# Altium PCB VTM Ethernet Module.PcbDoc
Units mil, origin at the board's own origin, x right, y up, seen from the top; angles counter-clockwise.
Board outline 2475 x 2800 mil, 2 copper layers (Top Layer, Bottom Layer); 58 components, 35 nets, 198 pads, 38 vias.
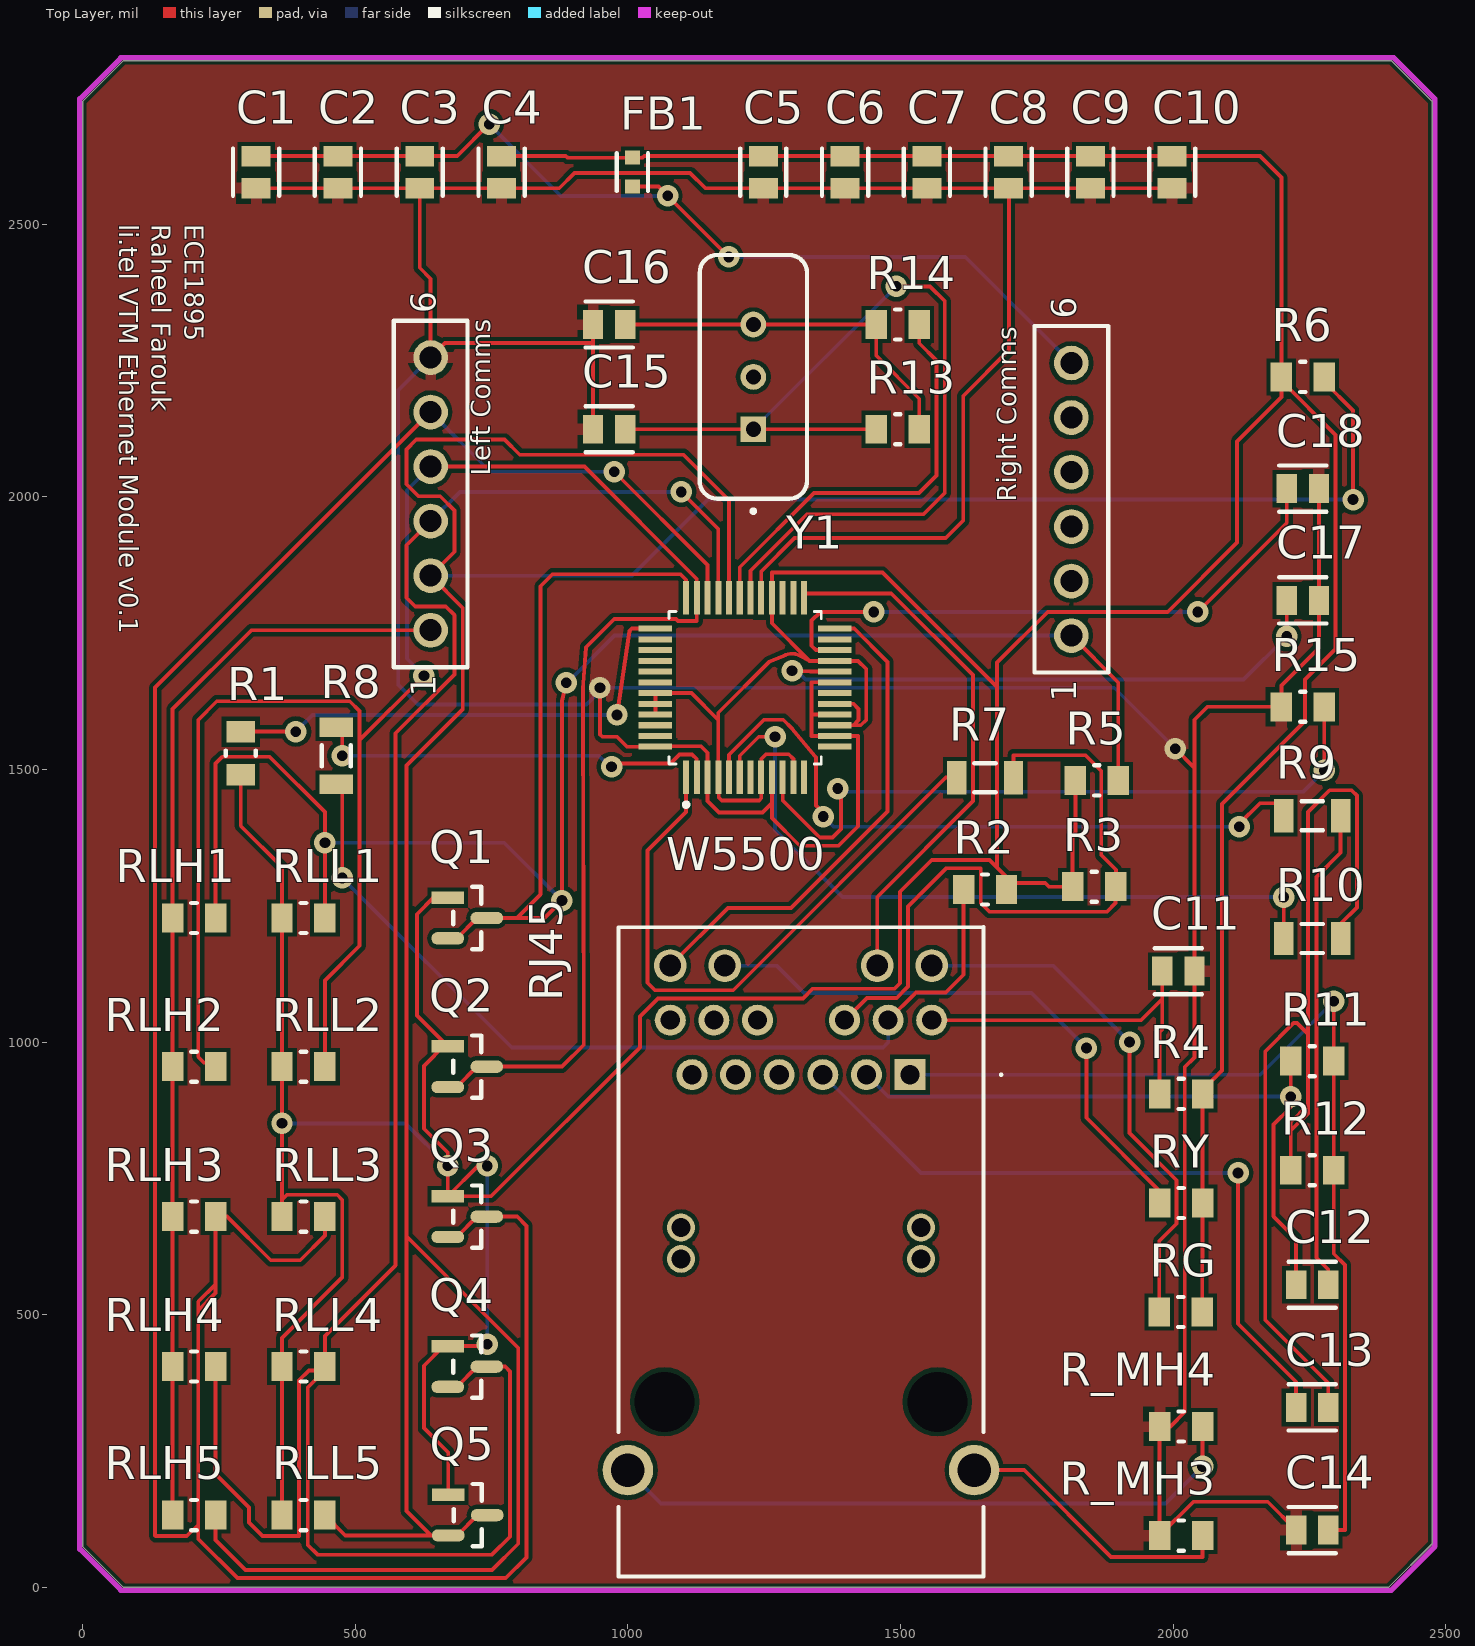
[diagram p0: Top Layer view]
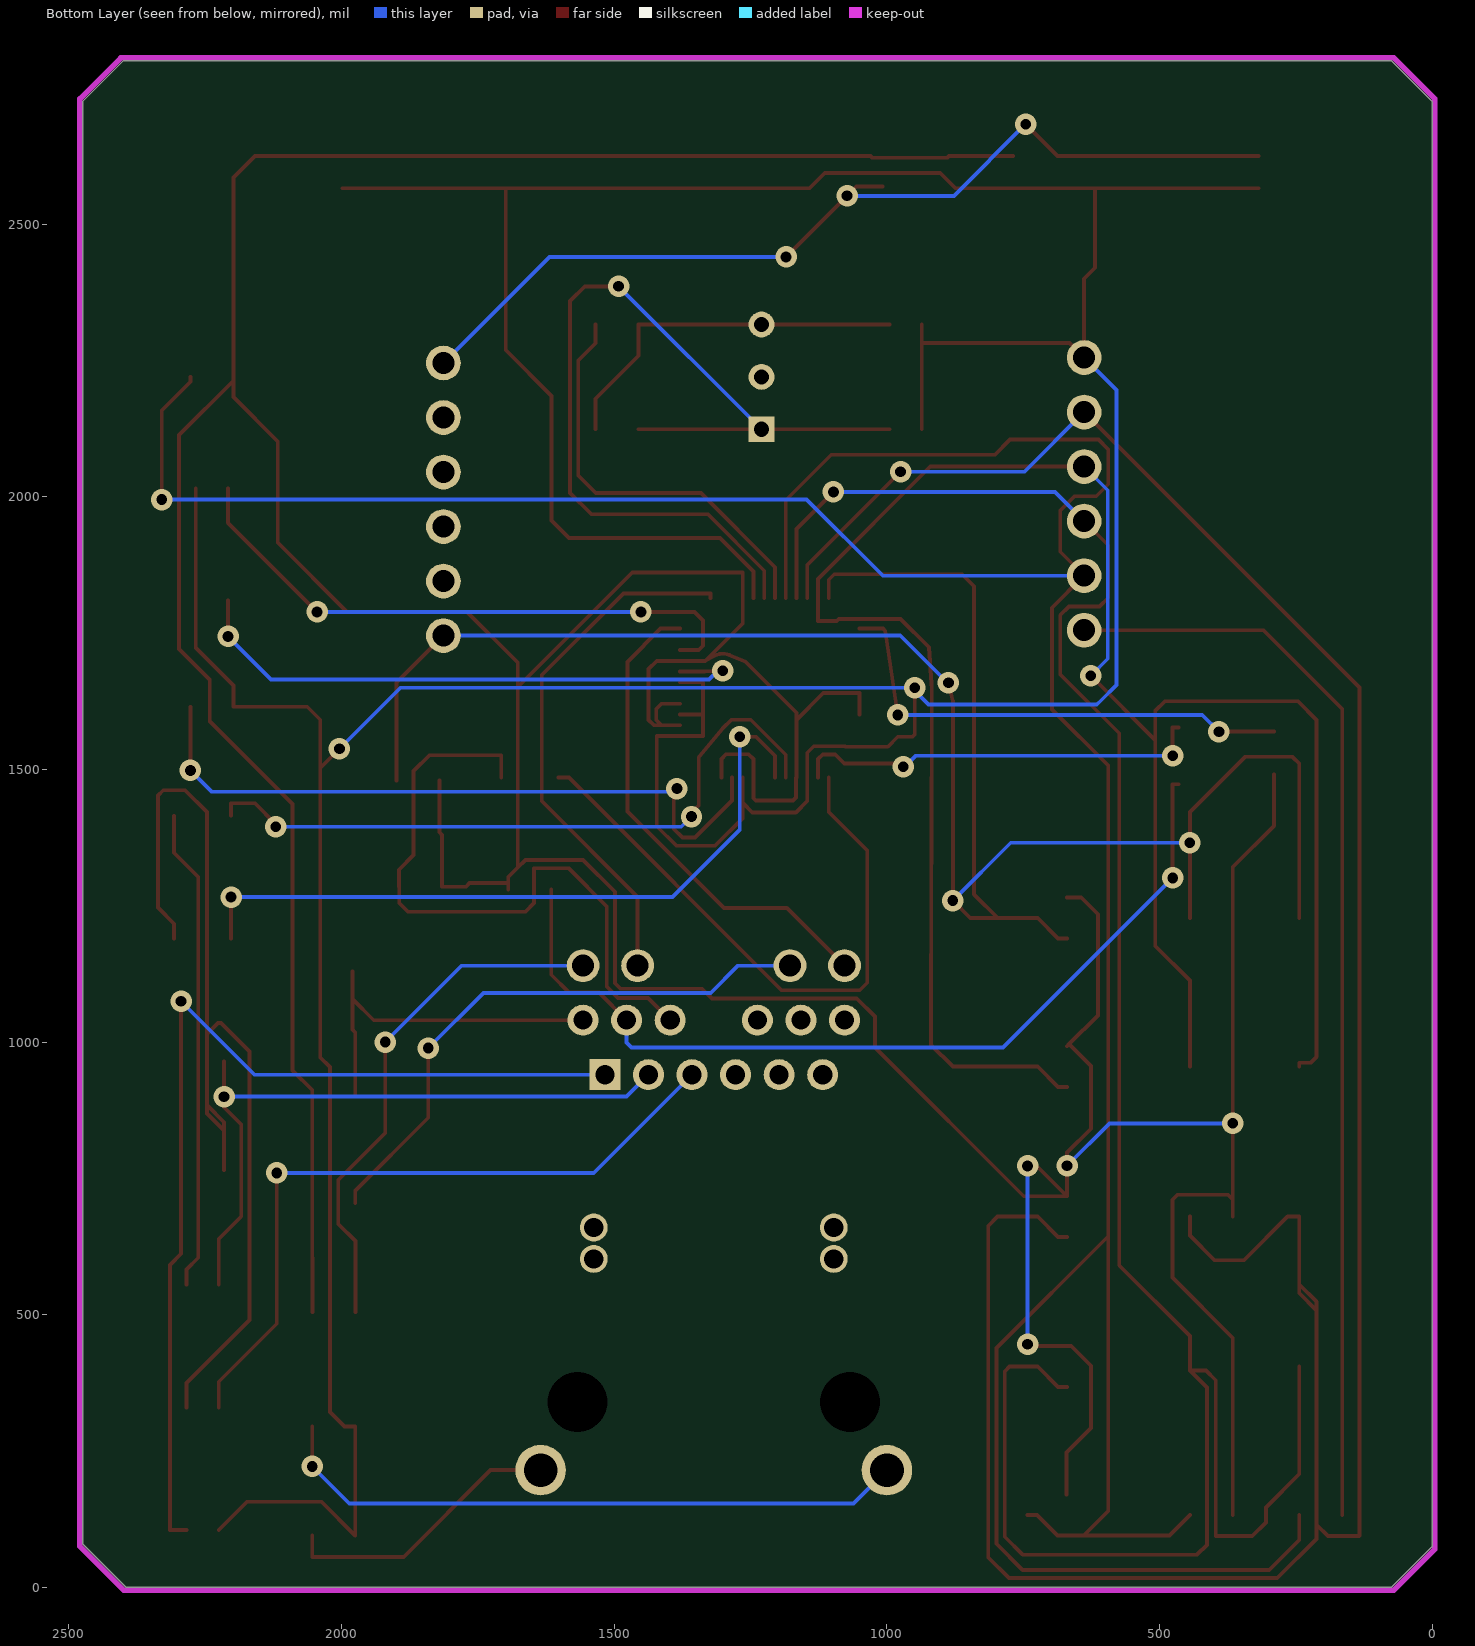
[diagram p1: Bottom Layer view, seen from below]
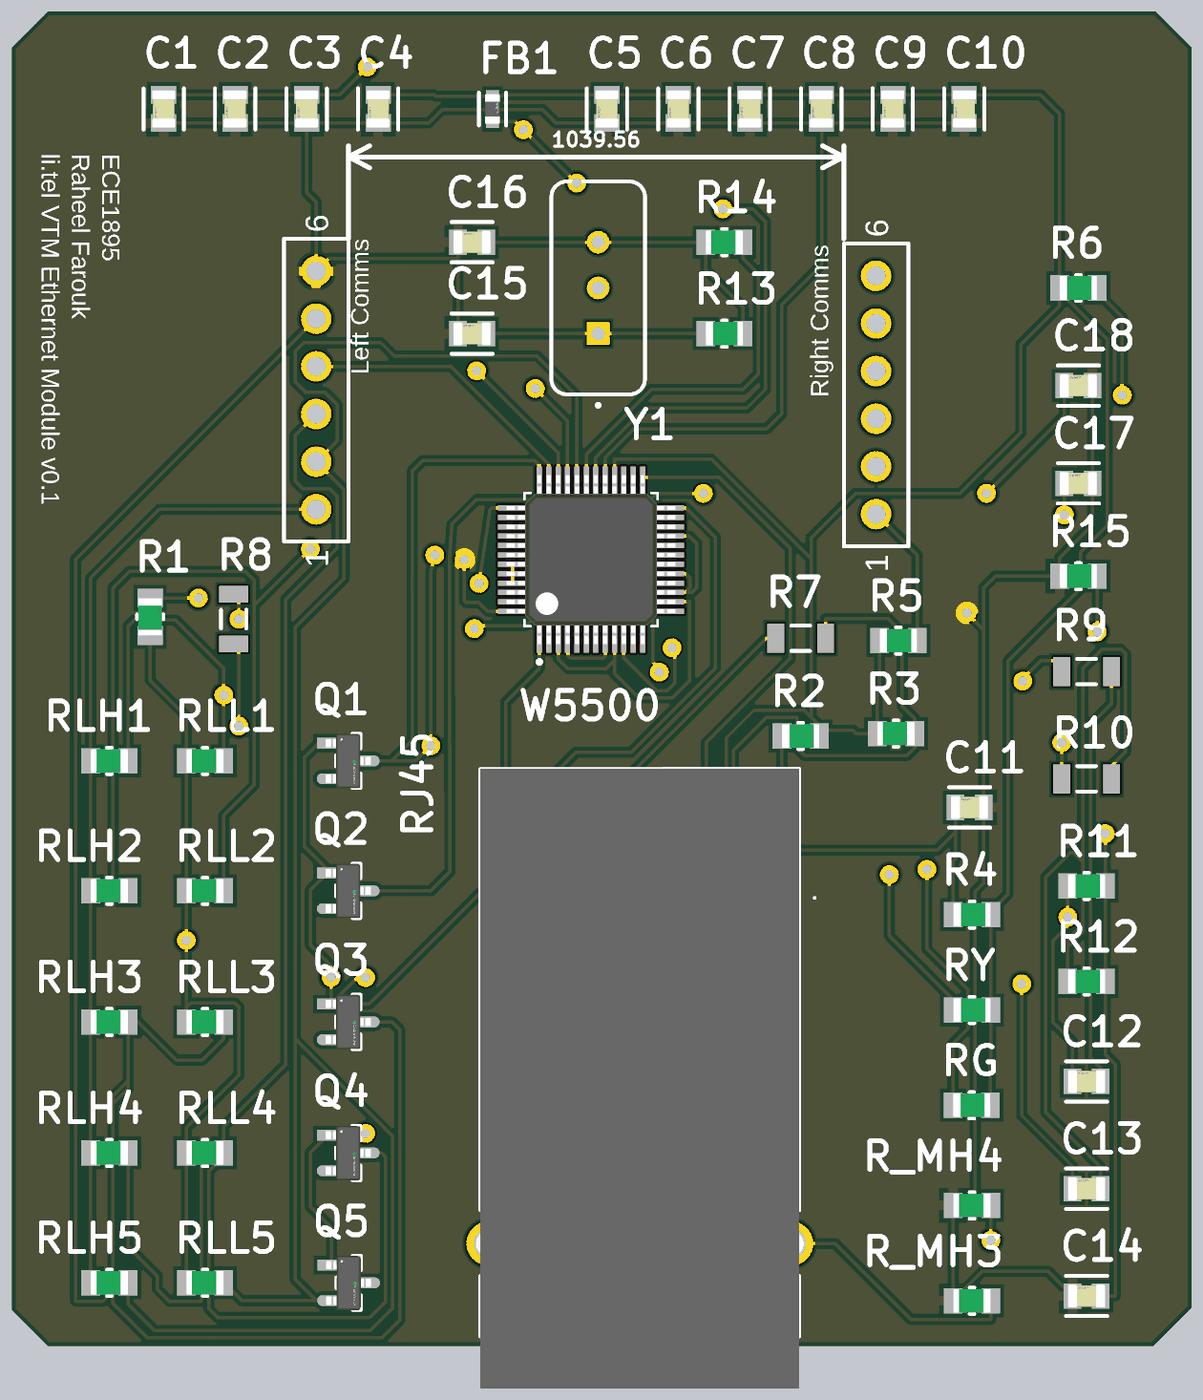
[diagram p2: 3D render of the assembled board from above, using the file's embedded part models]

## Layer stack, top to bottom
Top Solder: solder mask 0.4, Solder Resist, Dk 3.5
Top Layer: signal copper 1.4
Dielectric 1: dielectric 12.6, FR-4, Dk 4.8
Bottom Layer: signal copper 1.4
Bottom Solder: solder mask 0.4, Solder Resist, Dk 3.5

## Board outline
0,75 0,2725 75,2800 2400,2800 2475,2725 2475,80 2395,0 75,0

## Design rules (kind name [scope] priority, off if disabled: settings)
BoardOutlineClearance [All] p1: gap=7.87 ignorepadtopadclearanceinfootprint=FALSE except(15.75: Arc-SplitBarrior Arc-SplitContinuation Track-SplitBarrior Track-SplitContinuation SMDPad-SplitBarrior SMDPad-SplitContinuation THPad-SplitBarrior THPad-SplitContinuation Via-SplitBarrior Via-SplitContinuation Fill-SplitBarrior Fill-SplitContinuation Poly-SplitBarrior Poly-SplitContinuation Region-SplitBarrior Region-SplitContinuation Text-SplitBarrior Text-SplitContinuation)
Clearance "Clearance Bottom Layer" [OnLayer('Bottom Layer')] p1: gap=8 ignorepadtopadclearanceinfootprint=TRUE except(10: Arc-Text Track-Text SMDPad-Text THPad-Text Via-Text Fill-Text Poly-Text Region-Text Text-Text)
Clearance "Clearance Top Layer" [OnLayer('Top Layer')] p2: gap=8 ignorepadtopadclearanceinfootprint=TRUE except(10: Arc-Text Track-Text SMDPad-Text THPad-Text Via-Text Fill-Text Poly-Text Region-Text Text-Text)
Clearance [All] p3: gap=7.87 ignorepadtopadclearanceinfootprint=FALSE except(3.5: Arc-Arc Arc-Track Arc-SMDPad Track-Track Track-SMDPad SMDPad-SMDPad; 5: Arc-Via Track-Via SMDPad-Via THPad-Via Via-Via; 10: Arc-Text Track-Text SMDPad-Text THPad-Text Via-Text Fill-Text Poly-Text Region-Text Text-Text)
HoleSize [All] p1: absolutevalues=TRUE maxlimit=248.03 minlimit=7.87 maxpercent=80.000 minpercent=20.000
MinimumAnnularRing [All] p1: minimumring=3
MinimumSolderMaskSliver [All] p1: minsoldermaskwidth=3.94
PolygonConnect PolygonConnect_1 [All] p1: thpad.connectstyle=Relief thpad.reliefconductorwidth=20 thpad.reliefentries=4 thpad.polygonreliefangle="90 Angle" thpad.airgapwidth=10 smdpad.connectstyle=Relief smdpad.reliefconductorwidth=20 smdpad.reliefentries=4 smdpad.polygonreliefangle="90 Angle" smdpad.airgapwidth=10 via.connectstyle=Direct via.reliefconductorwidth=20 via.reliefentries=4 via.polygonreliefangle="90 Angle" via.airgapwidth=10
RoutingCorners [All] p1: cornerstyle=Round minsetback=100 maxsetback=100
RoutingVias [All] p1: holewidth=19.68 width=39.37 viastyle="Through Hole" minholewidth=7.87 minwidth=17.72 maxholewidth=39.37 maxwidth=78.74
SilkToSilkClearance [All] p1: silktosilkclearance=3.94
SilkToSolderMaskClearance [IsPad] p1: minsilkscreentomaskgap=3.94 clearancetoexposedcopper=TRUE
SolderMaskExpansion [All] p1: expansion=4 istentingtop=FALSE
Width [All] p1: maxlimit=100 minlimit=3.5 preferedwidth=7 minimp=50.000000 maximp=50.000000 favimp=50.000000
25 further rules are at their usual default settings.

## Components (designator, comment, footprint, x,y, rotation, side; value= is the part's Value field where it differs from the comment)
C1 "1uF" FP-C0805C-DN-MFG 318.27,2595.43 r90 top value="18 pF"
C2 "0.1uF" FP-C0805C-DN-MFG 468.27,2595.43 r90 top value="18 pF"
C3 "0.1uF" FP-C0805C-DN-MFG 618.27,2595.43 r90 top value="18 pF"
C4 "1uF" FP-C0805C-DN-MFG 768.27,2595.43 r90 top value="18 pF"
C5 "0.1uF" FP-C0805C-DN-MFG 1248.27,2595.43 r90 top value="18 pF"
C6 "0.1uF" FP-C0805C-DN-MFG 1398.27,2595.43 r90 top value="18 pF"
C7 "1uF" FP-C0805C-DN-MFG 1548.27,2595.43 r90 top value="18 pF"
C8 "0.1uF" FP-C0805C-DN-MFG 1698.27,2595.43 r90 top value="18 pF"
C9 "0.1uF" FP-C0805C-DN-MFG 1848.27,2595.43 r90 top value="18 pF"
C10 "0.1uF" FP-C0805C-DN-MFG 1998.27,2595.43 r90 top value="18 pF"
C11 "22nF" FP-C0805C-DN-MFG 2009.53,1130 r0 top value="18 pF"
C12 "6.8nF" FP-C0805C-DN-MFG 2255,555 r0 top value="18 pF"
C13 "6.8nF" FP-C0805C-DN-MFG 2255,330 r0 top value="18 pF"
C14 "0.1uF" FP-C0805C-DN-MFG 2255,105 r0 top value="18 pF"
C15 "18pF" FP-C0805C-DN-MFG 965.47,2123.94 r0 top value="18 pF"
C16 "18pF" FP-C0805C-DN-MFG 965.47,2316.06 r0 top value="18 pF"
C17 "4.7uF" FP-C0805C-DN-MFG 2237.83,1810 r0 top value="18 pF"
C18 "0.1uF" FP-C0805C-DN-MFG 2237.83,2015 r0 top value="18 pF"
FB1 "BLM18BD121BH1D" FP-BLM18-0_15-t0_8-MFG 1008.27,2595.43 r90 top
"Left Comms" "SAMTEC-TSW-106-07-X-SJ" SAMTEC-TSW-106-07-X-S 638.27,2005.43 r90 top
Q1 "BSS138" FP-318-08-IPC_B 705.47,1227.6 r0 top
Q2 "BSS138" FP-318-08-IPC_B 705.47,955 r0 top
Q3 "BSS138" FP-318-08-IPC_B 705.47,680 r0 top
Q4 "BSS138" FP-318-08-IPC_B 705.47,405 r0 top
Q5 "BSS138" FP-318-08-IPC_B 706.31,132.6 r0 top
R1 "4.7k" FP-CPF0805-MFG 290,1530 r270 top
R2 "49.9R" FP-CPF0805-MFG 1655,1280 r0 top
R3 "49.9R" FP-CPF0805-MFG 1855,1285 r180 top
R4 "10R" FP-CPF0805-MFG 2014.53,905 r0 top
R5 "4.7k" FP-CPF0805-MFG 1860,1480 r0 top
R6 "4.7k" FP-CPF0805-MFG 2237.83,2220 r0 top
R7 "3.3R" RESC3216X70X50LL05T20 1655,1485 r0 top
R8 "3.3R" RESC3216X70X50LL05T20 465,1525 r270 top
R9 "3.3R" RESC3216X70X50LL05T20 2255,1415 r0 top
R10 "3.3R" RESC3216X70X50LL05T20 2255,1190 r0 top
R11 "49.9R" FP-CPF0805-MFG 2255,965 r0 top
R12 "49.9R" FP-CPF0805-MFG 2255,765 r0 top
R13 "1M" FP-CPF0805-MFG 1495,2123.94 r0 top
R14 "0R" FP-CPF0805-MFG 1495,2316.06 r180 top
R15 "12.4k" FP-CPF0805-MFG 2237.83,1615 r0 top
R_MH3 "0R" FP-CPF0805-MFG 2014.53,95 r180 top
R_MH4 "0R" FP-CPF0805-MFG 2014.53,295 r180 top
RG "470R" FP-CPF0805-MFG 2013.9,505 r0 top
"Right Comms" "SAMTEC-TSW-106-07-X-SJ" SAMTEC-TSW-106-07-X-S 1813.27,1995.43 r90 top
RJ45 "7499711421" 7499711421 1517.28,940.2 r0 top
RLH1 "10k" FP-CPF0805-MFG 204.37,1227.6 r180 top
RLH2 "10k" FP-CPF0805-MFG 204.37,955 r180 top
RLH3 "10k" FP-CPF0805-MFG 204.37,680 r180 top
RLH4 "10k" FP-CPF0805-MFG 204.37,405 r180 top
RLH5 "10k" FP-CPF0805-MFG 204.37,132.6 r180 top
RLL1 "10k" FP-CPF0805-MFG 405,1227.6 r180 top
RLL2 "10k" FP-CPF0805-MFG 405,955 r180 top
RLL3 "10k" FP-CPF0805-MFG 405,680 r180 top
RLL4 "10k" FP-CPF0805-MFG 405,405 r180 top
RLL5 "10k" FP-CPF0805-MFG 405,132.6 r180 top
RY "470R" FP-CPF0805-MFG 2014.53,705 r0 top
W5500 "W5500" QFP50P900X900X160-48N 1215,1650 r90 top
Y1 "25MHz" ECS-4X-3IL 1230,2220 r90 top

## Footprints (in the part's own frame and the unit in brackets; to place one, negate y for a bottom-side part, rotate by r counter-clockwise, add the part's x,y. Pads: shape width x height; smd on the part's side, far side on the other; paste and mask are expansions set on the pad)
7499711421 [mm]
  rect 1.446x1.446 hole 0.89: 1(0,0)
  round 1.446 hole 0.89: 2(-2.03,0) 3(-4.06,0) 4(-6.09,0) 5(-8.12,0) 6(-10.15,0) 7(1.015,2.54) 8(-1.015,2.54) 9(-3.045,2.54) 10(-7.105,2.54) 11(-9.135,2.54) 12(-11.165,2.54)
  round 1.3 hole 0.89: 13(0.515,-7.12) 14(-10.665,-7.12) 15(0.515,-8.58) 16(-10.665,-8.58)
  round 1.53 hole 1.02: 17(1.015,5.08) 18(-1.525,5.08) 19(-8.625,5.08) 20(-11.165,5.08)
  round 1.4 hole 2.8 unplated: MH1(1.275,-15.24) MH2(-11.425,-15.24)
  round 2.355 hole 1.57: MH3(2.99,-18.42) MH4(-13.14,-18.42)
  silkscreen extent -13.58,-23.37 4.3,6.88, body extent -13.82,-26.14 3.67,6.88, height 13.97
ECS-4X-3IL [mm]
  rect 1.2x1.2 hole 0.7: 1(-2.44,0)
  round 1.2 hole 0.7: 2(0,0) 3(2.44,0)
  silkscreen extent -6.34,-2.5 5.68,2.5, body extent -5.68,-2.5 5.68,2.5, height 3.5
FP-318-08-IPC_B [mil]
  rect 60.01x22.76 smd paste+0 mask+0: 1(-35.83,37.4)
  rrect100% 60.01x22.76 smd paste+0 mask+0: 2(-35.83,-37.4) 3(35.83,0)
  silkscreen extent -26,-57 26,57, body extent -76,-67 76,67, height 10
FP-BLM18-0_15-t0_8-MFG [mm]
  rect 0.65x0.7 smd paste+0 mask+0: 1(-0.675,0) 2(0.675,0)
  silkscreen extent -0.88,-0.73 0.88,0.73, body extent -1.1,-0.58 1.1,0.58, height 0.25
FP-C0805C-DN-MFG [mm]
  rect 0.95x1.35 smd paste+0 mask+0: 1(-0.75,0) 2(0.75,0)
  silkscreen extent -1.1,-1.07 1.1,1.08, body extent -1.4,-0.85 1.4,0.85, height 0.25
FP-CPF0805-MFG [mm]
  rect 1x1.35 smd paste+0 mask+0: 1(-1,0) 2(1,0)
  silkscreen extent -0.13,-0.7 0.12,0.7, body extent -1.6,-0.8 1.6,0.8, height 0.25
QFP50P900X900X160-48N [mm]
  rect 1.56x0.281 smd mask+0.127: 1(-4.18,2.75) 2(-4.18,2.25) 3(-4.18,1.75) 4(-4.18,1.25) 5(-4.18,0.75) 6(-4.18,0.25) 7(-4.18,-0.25) 8(-4.18,-0.75) 9(-4.18,-1.25) 10(-4.18,-1.75) 11(-4.18,-2.25) 12(-4.18,-2.75) 25(4.18,-2.75) 26(4.18,-2.25) 27(4.18,-1.75) 28(4.18,-1.25) 29(4.18,-0.75) 30(4.18,-0.25) 31(4.18,0.25) 32(4.18,0.75) 33(4.18,1.25) 34(4.18,1.75) 35(4.18,2.25) 36(4.18,2.75)
  rect 0.281x1.56 smd mask+0.127: 13(-2.75,-4.18) 14(-2.25,-4.18) 15(-1.75,-4.18) 16(-1.25,-4.18) 17(-0.75,-4.18) 18(-0.25,-4.18) 19(0.25,-4.18) 20(0.75,-4.18) 21(1.25,-4.18) 22(1.75,-4.18) 23(2.25,-4.18) 24(2.75,-4.18) 37(2.75,4.18) 38(2.25,4.18) 39(1.75,4.18) 40(1.25,4.18) 41(0.75,4.18) 42(0.25,4.18) 43(-0.25,4.18) 44(-0.75,4.18) 45(-1.25,4.18) 46(-1.75,4.18) 47(-2.25,4.18) 48(-2.75,4.18)
  silkscreen extent -5.55,-3.55 3.55,3.55, body extent -4.5,-4.5 4.5,4.5, height 1.6
RESC3216X70X50LL05T20 [mm] "Chip Resistor, 2-Leads, Body 3.20x1.60mm, IPC High Density"
  rect 0.9x1.55 smd: 1(-1.325,0) 2(1.325,0)
  silkscreen extent -0.5,-0.68 0.5,0.67, body extent -1.63,-0.82 1.62,0.82, height 0.7
SAMTEC-TSW-106-07-X-S [mm]
  round 1.62 hole 1.02: 1(-6.35,0) 2(-3.81,0) 3(-1.27,0) 4(1.27,0) 5(3.81,0) 6(6.35,0)
  silkscreen extent -8.07,-1.72 8.07,1.72

## Part data
C1 C2 C3 C4 C5 C6 C7 C8 C9 C10 C11 C12 C13 C14 C15 C16 C17 C18: library part CMP-1036-01133-2, "CAP CER 18PF 25V 20% NP0 0805", Capacitance="18 pF", Manufacturer=KEMET, Manufacturer Part Number=C0805C180M3GACTU, Package=C0805C-DN, Temperature="-55°C to +125°C", Temperature Characteristic=C0G, Temperature Coefficient=30ppm/°C, Temperature Range High=+125°C, Temperature Range Low=-55°C, Tolerance=0.2, Voltage Rating="25 V", Automotive=No, Category=Cap, ComponentLink2Description=Datasheet, ComponentLink2URL=https://content.kemet.com/datasheets/KEM_C1003_C0G_SMD.pdf, Device Class L1="Passive Components", Device Class L2=Capacitors, Device Class L3="Ceramic Capacitors", Digikey Description="CAP CER 18PF 25V 20% NP0 0805", Height=0.88mm, Ipc Land Pattern Name=CAPC200125X78, Lead Free=Yes, Material=Ceramic, Mouser Description="Multilayer Ceramic Capacitors MLCC - SMD/SMT 25volts 18pF C0G 20%", Octopart=https://octopart.com/c0805c180m3gactu-kemet-17137232, RoHS=TRUE
FB1: library part CMP-06046-002548-1, "Chip Ferrite Bead, 0603, 120Ω @ 100MHz, 0.4Ω, 25%, 300mA", Case Code (Imperial)=0603, Case Code (Metric)=1608, DC Resistance (DCR)=400mR, Max Current Rating=300mA, Max Operating Temperature=150°C, Min Operating Temperature=-55°C, Ratings=AEC-Q200, Case/Package=0603, Number of Lines=1, RoHS Compliant=Yes
Q1 Q2 Q3 Q4 Q5: library part CMP-07173-000101-1, "MOSFET N-CH 50V 220MA SOT-23", Case/Package=SOT-23, Continuous Drain Current (ID)=220mA, Drain to Source Breakdown Voltage=50V, Drain to Source Resistance=3.5R, Gate to Source Voltage (Vgs)=20V, Input Capacitance=27pF, Max Operating Temperature=150°C, Max Power Dissipation=360mW, Min Operating Temperature=-55°C, On-State Resistance=6R, Package Quantity=1, Threshold Voltage=1.3V, Contact Plating=Tin, Current Rating=220mA, Drain to Source Voltage (Vdss)=50V, Dual Supply Voltage=50V, Element Configuration=Single, Fall Time=9ns, Height=0.93mm, Lead Free="Lead Free", Length=2.92mm, Mount="Surface Mount", Nominal Vgs=1.3V, Number of Elements=1, Number of Pins=3, Packaging="Tape and Reel", Power Dissipation=360mW, Radiation Hardening=No, Rds On Max=3.5R, REACH SVHC="No SVHC", Rise Time=9ns, Termination=SMD/SMT, Turn-Off Delay Time=20ns, Turn-On Delay Time=2.5ns, Voltage Rating (DC)=50V, Weight=0.03g, Width=1.3mm
R1 R2 R3 R4 R5 R6 R11 R12 R13 R14 R15 R_MH3 R_MH4 RG RLH1 RLH2 RLH3 RLH4 RLH5 RLL1 RLL2 RLL3 RLL4 RLL5 RY: library part CMP-03211-011426-1, "RES SMD 1.6M OHM 0.1% 1/10W 0805", Case Code (Imperial)=0805, Case Code (Metric)=2012, Max Operating Temperature=155°C, Max Power Dissipation=100mW, Min Operating Temperature=-55°C, Number of Resistors=1, Package Quantity=1000, Resistance=1.6MR, Resistor Type="Thin Film", Temperature Coefficient=25ppm/°C, Tolerance=0.1%, Voltage Rating=100V, Case/Package=0805, ELV=Compliant, Height=0.55mm, Length=2mm, Mount="Surface Mount", Number of Terminations=2, Packaging="Tape and Reel", Power Rating=100mW, RoHS Compliant=Yes, Series="CPF, Neohm", Termination=Solder, Weight=0.000194oz, Width=1.25mm
R7 R8 R9 R10: library part CMP-2003-00687-1, Manufacturer=Panasonic, Part Number=ERJ-8RQF3R3V
RJ45: "Connector", Manufacturer_Name="Wurth Elektronik", Mouser Part Number=710-7499711421, Datasheet Link=https://www.we-online.com/catalog/datasheet/7499711421.pdf, Height=13.87mm, Manufacturer_Part_Number=7499711421, Mouser Price/Stock=https://www.mouser.co.uk/ProductDetail/Wurth-Elektronik/7499711421?qs=ljCeji4nMDkSFYeFRPO9OA%3D%3D
W5500: "Ethernet Controller 10/100 Base-T/TX PHY SPI Interface 48-LQFP (7x7)", Package=None, Availability="In Stock", Check_prices=https://www.snapeda.com/parts/W5500/WIZnet/view-part/?ref=eda, MF=WIZnet, MP=W5500, Price=None, Purchase-URL=https://pricing.snapeda.com/search/part/W5500/?ref=eda, SnapEDA_Link=https://www.snapeda.com/parts/W5500/WIZnet/view-part/?ref=snap
Y1: library part CMP-1669-00002-2, "CRYSTAL 8.00 MHZ 20PF 49US", Manufacturer=ECS, PartNumber=ECS-80-20-4X, ComponentLink1Description=Datasheet, ComponentLink1URL=http://www.ecsxtal.com/store/pdf/hc-49usx.pdf, PackageReference=4X-3IL

## Via types
v1: diameter 39.37, hole 19.68, Top Layer to Bottom Layer, 38 vias

## Nets (pads, with @x,y where several pads share a name; then routed paths per layer and width w, separated by ;. In a path a pad name is that pad's centre, name@x,y a point inside that pad or via, vN(x,y) a via of type N, cw(c..) or ccw(c..) an arc to the next point about the centre after c; other vN are vias at no path point)
3v3In: "Right Comms.6" C1.2 C2.2 C3.2 FB1.1 | length 1772.4
  Top Layer w7: C1.2 C2.2 C3.2 687,2624.96 v1(745.52,2683.48) ; FB1.1 1056.14,2568.86 v1(1073,2552) v1(1185,2440)
  Bottom Layer w7: v1(745.52,2683.48) 877,2552 v1(1073,2552) ; v1(1185,2440) 1618.7,2440 1813.27,2245.43
+5: "Left Comms.1" RLH1.2 RLH2.2 RLH3.2 RLH4.2 RLH5.2 | length 2011.5
  Top Layer w7: RLH5.2 RLH4.2 RLH3.2 RLH2.2 RLH1.2 165,1611 309.43,1755.43 638.27,1755.43
ACTn: W5500.27
CS: "Left Comms.2" Q5.2 Q5.3 R6.2 RLH5.1 RLL5.1 W5500.32 | length 6597.2
  Top Layer w7: RLH5.1 243.74,87 298.74,32 751,32 799,80 799,439 594,644 ; RLL5.1 481.77,95.2 639,95.2 ; Q5.3 724.4,132.6 687,95.2 Q5.2 639,95.2 ; W5500.32 1185.47,1993.79 1102.07,2077.19 801.81,2077.19 774,2105 612,2105 594,2087 594,2023 616,2001 656,2001 682,1975 682,1899.17 638.27,1855.43 697,1796.7 697,1610 594,1507 594,644 ; R6.2 2277.2,2211 2330,2158.2 v1(2330,1995) ; 594,644 594,140.2 639,95.2
  Bottom Layer w7: 638.27,1855.43 1007.64,1855.43 1147.2,1995 v1(2330,1995)
GND: "Left Comms.6" C1.1 C2.1 C3.1 C4.1 C5.1 C6.1 C7.1 C8.1 C9.1 C10.1 C11.2 C14.1 C15.1 C16.1 C17.2 C18.2 R15.1 R_MH3.2 R_MH4.2 W5500.3 W5500.9 W5500.14 W5500.16 W5500.19 W5500.29 W5500.48 | length 9455.6
  Top Layer w7: C1.1 C2.1 C3.1 ; C15.1 935.94,2282 ; C16.1 935.94,2282 ; v1(948.81,1650) 948.81,1564.1 952.92,1560 980,1560 998.27,1541.73 1076.49,1541.73 1076.49,1542.64 1134.09,1542.64 1146.1,1530.63 W5500.3 1146.1,1441.9 1167,1421 1247,1421 1264.21,1438.21 ; W5500.29 1244.53,1863 1305.82,1924.3 1583,1924.3 1615,1956.3 1615,2185 1699,2269 C8.1@1699,2565.91 ; W5500.9 1264.21,1438.21 ; W5500.16 1337,1600.79 ; W5500.19 1337,1659.84 1337,1600.79 ; C10.1 C9.1 C8.1@1699,2565.91 ; v1(2004,1538) 2039.06,1502.94 ; C14.1 2173.47,157 2037.16,157 R_MH3.2 R_MH4.2 1995,295 2021.34,321.34 2021.34,954.29 2039.06,972 C11.2 2039.06,1502.94 ; C18.2 C17.2 2267.36,1722.9 2198.46,1654 R15.1 2063,1615 2039.06,1591.06 2039.06,1502.94 ; C3.1 618.27,2420 638.27,2400 638.27,2255.43 664.83,2282 935.94,2282 ; C3.1 C4.1 874,2565.91 902.09,2594 1114,2594 1142.09,2565.91 C5.1 C6.1 C7.1 C8.1 C8.1@1699,2565.91 ; 1264.21,1438.21 1264.21,1410.95 1315.16,1360 1386,1360 1422,1396 1422,1561.42 W5500.14 1337,1561.42 1337,1600.79
  Bottom Layer w7: 638.27,2255.43 579,2196.17 579,1655 607,1627 615,1619 924,1619 v1@951.91,1646.91 ; v1(948.81,1650) v1@951.91,1646.91 ; v1(2004,1538) 1892,1650 955,1650 v1@951.91,1646.91
INTn: "Right Comms.1" Q1.2 Q1.3 R5.2 RLH1.1 RLL1.1 W5500.36 | length 4045.3
  Top Layer w7: RLH1.1 243.74,1511 255.92,1523.18 343.08,1523.18 444.37,1421.89 v1(444.37,1365.63) RLL1.1 ; Q1.2 686,1190.2 723.4,1227.6 Q1.3 796.6,1227.6 ; v1(887.14,1659.28) 879,1625.59 v1(879,1259.6) 847,1227.6 796.6,1227.6 ; W5500.36 1106.73,1847.85 1096.58,1858 862,1858 840,1836 840,1271 796.6,1227.6 ; 1813.27,1745.43 1899.37,1659.33 R5.2
  Bottom Layer w7: v1(444.37,1365.63) 772.97,1365.63 v1(879,1259.6) ; v1(887.14,1659.28) 889.28,1659.28 975.43,1745.43 1813.27,1745.43
LINKn: RJ45.18 W5500.25 | length 985.9
  Top Layer w7: W5500.25 1323.27,1823 1483,1823 1633,1673 1633,1442 1457.24,1266.24 RJ45.18
MISO: "Left Comms.5" Q3.2 Q3.3 RLH3.1 RLL3.1 W5500.34 | length 5416.9
  Top Layer w7: RLL3.1 444.37,645.37 399,600 345,600 265,680 RLH3.1 243.74,555.74 ; 638.27,2155.43 133,1650.17 133,95 134,94 191,94 212,115 ; Q3.2 686,642.6 723.4,680 Q3.3 797,680 814,663 814,55 776,17 284,17 212,89 212,115 ; v1(975,2046) 1146.1,1874.9 W5500.34 ; 212,115 212,508 ; 212,508 212,524 243.74,555.74 ; 212,508 243.74,539.74 243.74,555.74
  Bottom Layer w7: 638.27,2155.43 747.7,2046 v1(975,2046)
MOSI: "Left Comms.4" Q2.2 Q2.3 RLH2.1 RLL2.1 W5500.35 | length 4126.6
  Top Layer w7: RLH2.1 243.74,962 223,962 212,973 212,1591 246,1625 490,1625 508,1607 508,1554 ; RLL2.1 444.37,1113 508,1176.63 508,1554 ; v1(626,1672) 508,1554 ; 638.27,2055.43 920.57,2055.43 1126.42,1849.58 W5500.35 1126.42,1772 1092,1772 1088,1776 975,1776 923.05,1724.05 918.24,1657.05 cw(c887.14,1659.28) 917.99,1654.7 ccw(c948.81,1650) 917.63,1649.94 918.95,1000.75 918.95,994.95 879,955 Q2.3 723.4,955 686,917.6 Q2.2
  Bottom Layer w7: v1(626,1672) 594.88,1703.12 594.88,2012.04 638.27,2055.43
NetC12_2: C12.2 R9.2 | length 887.2
  Top Layer w7: C12.2 2284.53,583 2263,604.53 2263,1303 2307.17,1347.17 R9.2
NetC13_2: C13.2 R10.2 R12.1 | length 1923.5
  Top Layer w7: R12.1 2215.63,837.63 ; C13.2 2284.53,375 2169,490.53 2169,983 2221,1035 2227,1035 2247,1015 ; R10.2 2307.17,1217 2337,1246.83 2337,1452 2327,1462 2287,1462 2247,1422 2247,1015 ; 2215.63,837.63 2215.63,853 2247,884.37 ; 2215.63,837.63 2247,869 2247,884.37 ; 2247,884.37 2247,1015
NetC15_2: C15.2 R13.1 W5500.30 Y1.1 | length 1748.5
  Top Layer w7: C15.2 Y1.1 R13.1 ; W5500.30 1224.84,1864.53 1328.31,1968 1542,1968 1581,2007 1581,2359 1554,2386 v1(1492.06,2386)
  Bottom Layer w7: Y1.1 v1(1492.06,2386)
NetC16_2: C16.2 R13.2 R14.2 Y1.3 | length 685.4
  Top Layer w7: C16.2 Y1.3 R14.2 1455.63,2258.74 1534.37,2180 R13.2
NetC17_1: C17.1 W5500.20 | length 1091.3
  Top Layer w7: v1(1301,1681.19) 1334.69,1679.53 W5500.20 ; v1(2208.31,1744) C17.1
  Bottom Layer w7: v1(1301,1681.19) 1309.76,1681.19 1325.94,1665 2129.31,1665 v1(2208.31,1744)
NetC18_1: C18.1 W5500.22 | length 1100.2
  Top Layer w7: W5500.22 1345.1,1718.9 1337,1727 1337,1773 1353,1789 v1(1451,1789) ; v1(2045,1789) 2208.31,1952.31 C18.1
  Bottom Layer w7: v1(1451,1789) v1(2045,1789)
NetR7_1: R7.1 W5500.1 | length 1139.7
  Top Layer w7: W5500.1 1106.73,1422 1036,1351.27 1036,1109 1049.78,1095.22 1193.22,1095.22 1583,1485 R7.1
NetR8_1: R8.1 W5500.2 | length 768.4
  Top Layer w7: R8.1 476,1577.17 v1(476,1525) ; v1(970,1505) 976.19,1511.19 1078.19,1511.19 1094.64,1527.64 1117.77,1527.64 1126.42,1519 W5500.2
  Bottom Layer w7: v1(476,1525) 947.31,1525 967.31,1505 v1(970,1505)
NetR9_1: R9.1 W5500.5 | length 1269.2
  Top Layer w7: W5500.5 1185.47,1527 1249.66,1591.19 1285,1591.19 1301.19,1575 1343.38,1524.27 1345,1522.33 1345,1434 1358.35,1420.65 v1(1358.35,1413.72) ; v1(2121,1395) 2121,1400 2159,1438 2202.84,1438 R9.1
  Bottom Layer w7: v1(1358.35,1413.72) 1377.07,1395 v1(2121,1395)
NetR10_1: R10.1 W5500.6 | length 1349.6
  Top Layer w7: W5500.6 1205.16,1525.16 1240,1560 v1(1270,1560) ; R10.1 v1(2202.84,1266)
  Bottom Layer w7: v1(1270,1560) 1270,1389.29 1393.29,1266 v1(2202.84,1266)
NetR14_1: R14.1 W5500.31 | length 777
  Top Layer w7: W5500.31 1205.16,1871 1341.16,2007 1534,2007 1566,2039 1566,2250 1534.37,2281.63 R14.1
NetR15_2: R15.2 W5500.10 | length 1288.5
  Top Layer w7: W5500.10 1283.9,1443.1 1352,1375 1375,1375 1391,1391 1391,1459 v1(1385,1465) ; v1(2277.2,1498.2) R15.2
  Bottom Layer w7: v1(1385,1465) 1391,1459 2238,1459 v1(2277.2,1498.2)
NetR_MH3_1: R_MH3.1 RJ45.MH3 | length 523.8
  Top Layer w7: RJ45.MH3 1727,215 1886,56 2053.9,56 R_MH3.1
NetR_MH4_1: R_MH4.1 RJ45.MH4 | length 1180.4
  Top Layer w7: v1(2053.9,221.9) R_MH4.1
  Bottom Layer w7: RJ45.MH4 1060.96,154 1986,154 v1(2053.9,221.9)
NetRG_1: RG.1 RJ45.17 | length 964.8
  Top Layer w7: v1(1920,1000) 1920,833 2006.34,746.66 2006.34,667 1974.53,635.18 RG.1
  Bottom Layer w7: RJ45.17 1779.8,1140.2 v1(1920,1000)
NetRJ45_19: RJ45.19 RY.1 | length 1065.5
  Top Layer w7: v1(1841,989) 1841,861.16 1975.16,727 RY.1
  Bottom Layer w7: RJ45.19 1272.8,1140.2 1323,1090 1740,1090 v1(1841,989)
RCT: C14.2 R11.2 R12.2 RJ45.1 | length 1841.9
  Top Layer w7: C14.2 2315,105 2315,591.37 2294.37,612 R12.2 R11.2 v1(2294.37,1075)
  Bottom Layer w7: RJ45.1 2159.57,940.2 v1(2294.37,1075)
RSTn: R1.1 W5500.37 | length 907.8
  Top Layer w7: R1.1 v1(391,1569.37) ; v1(980,1600) 1002.9,1754.17 1007,1758.27 W5500.37
  Bottom Layer w7: v1(391,1569.37) 421.63,1600 v1(980,1600)
RX_N: C12.1 R11.1 RJ45.2 | length 1235.2
  Top Layer w7: R11.1 v1(2215.63,900) 2215.63,880.63 2184,849 2184,680.47 2225.47,639 C12.1
  Bottom Layer w7: RJ45.2 1477.56,900 v1(2215.63,900)
RX_P: C13.1 RJ45.3 | length 1310.3
  Top Layer w7: v1(2119,760) 2119,483.47 2225.47,377 C13.1
  Bottom Layer w7: RJ45.3 1537.64,760 v1(2119,760)
SCLK: "Left Comms.3" Q4.2 Q4.3 RLH4.1 RLL4.1 W5500.33 | length 4364.1
  Top Layer w7: RLH4.1 243.74,208 305,146.74 305,119 330,94 397,94 397,380 415,398 RLL4.1@444.37,398 ; 638.27,1955.43 594,1911.17 594,1815 610,1799 666,1799 682,1783 682,1674.37 574,1566.37 574,590.63 444.37,461 RLL4.1 RLL4.1@444.37,398 ; Q4.2 686,367.6 723.4,405 Q4.3 775,405 784,396 784,93 751,60 431,60 413,78 413,366.63 RLL4.1@444.37,398 ; v1(1098,2009) 1165.79,1941.21 W5500.33
  Bottom Layer w7: 638.27,1955.43 691.83,2009 v1(1098,2009)
SPDLED: RJ45.20 W5500.24 | length 911.4
  Top Layer w7: RJ45.20 1183.52,1246 1299,1246 1476,1423 1476,1697.27 1415,1758.27 W5500.24
TCT: C11.1 R4.1 RJ45.7 | length 665.8
  Top Layer w7: RJ45.7 1941.2,1040.2 1980,1079 ; R4.1 1975.16,1018 1980,1022.84 1980,1079 ; C11.1 1980,1079
TX_N: R3.1 R7.2 RJ45.9 | length 1243.4
  Top Layer w7: RJ45.9 1438.2,1081 1493,1081 1513.86,1101.86 1513.86,1248.81 1584.05,1319 1647,1319 1647,1255 1663,1239 1878.37,1239 1894.37,1255 R3.1 1895,1285 1895,1316 1868,1343 1868,1497 1839,1526 1707.17,1526 R7.2
TX_P: R2.1 R8.2 RJ45.8 | length 1687.1
  Top Layer w7: R8.2 476,1472.83 v1(476,1301) ; RJ45.8 1528.13,1091 1583,1091 1615.63,1123.63 R2.1
  Bottom Layer w7: v1(476,1301) 787,990 1468.32,990 1477.32,999 RJ45.8
VCC: C4.2 C5.2 C6.2 C7.2 C8.2 C9.2 C10.2 FB1.2 Q1.1 Q2.1 Q3.1 Q4.1 Q5.1 R1.2 R2.2 R3.2 R4.2 R5.1 R6.1 RG.2 RLL1.2 RLL2.2 RLL3.2 RLL4.2 RLL5.2 RY.2 W5500.4 W5500.8 W5500.11 W5500.15 W5500.17 W5500.21 W5500.28 W5500.43 W5500.44 W5500.45 | length 11889.5
  Top Layer w7: R1.2 290,1396.63 365.63,1321 RLL1.2 RLL2.2 v1(365.63,851) 365.63,711 ; RLL5.2 RLL4.2 365.63,457.63 476,568 476,711 467,720 374.63,720 365.63,711 ; RLL3.2 365.63,711 ; Q2.1 Q2.1@665.76,996.28 ; Q1.1 643.54,1265 613.13,1234.59 613.13,1048.91 Q2.1@665.76,996.28 ; Q5.1 670.47,247.53 625.89,292.11 625.89,406.41 661.88,442.4 Q4.1 738.4,442.4 v1(742,446) ; v1(742,773) 725.24,773 Q3.1 ; C4.2 886,2624.96 888.95,2622.01 FB1.2 1027.1,2622.01 1030.06,2624.96 C5.2 C6.2 C7.2 C8.2 C9.2 C10.2 2159,2624.96 2198.46,2585.5 R6.1 R6.1@2198.46,2213 ; W5500.45 W5500.44 W5500.43 1116.63,1640.16 1165.79,1591 ; W5500.11 1303.58,1519.42 1295,1528 1253.53,1528 1244.53,1519 1244.53,1447.1 1240.43,1443 1172,1443 1166.51,1448.49 1166.51,1484.72 W5500.4 1165.79,1591 ; W5500.15 1413.31,1581.1 ; W5500.17 1413.53,1620.47 1423,1611 1423,1590.79 1413.31,1581.1 ; R2.2 R2.2@1694.37,1291.56 ; R5.1 1820.63,1385 1815.63,1380 R3.2 1772.06,1285 1765.5,1291.56 R2.2@1694.37,1291.56 ; RG.2 2053.27,604 2053.9,604.63 RY.2 R4.2 2053.9,912 2089.81,947.92 2089.81,1436.81 2242,1589 2242,1665 2298,1721 2298,2113.46 R6.1@2198.46,2213 ; Q2.1@665.76,996.28 625.92,956.44 625.92,841.08 669.64,797.36 v1(669.64,773.36) Q3.1 ; Q3.1 749,717.4 1022,990.4 1022,1047 1055.16,1080.16 1321,1080.16 1338.84,1098 1488.79,1098 1498.86,1108.08 1498.86,1275.63 1557.23,1334 1663,1334 1677,1320 ; 1165.79,1591 1165.79,1604 1258.95,1697.16 1288.77,1709.87 cw(c1301,1681.19) 1315.84,1708.61 1333.21,1699.21 ; 1333.21,1699.21 W5500.21 1422,1699.21 1437,1684.21 1437,1591 1427.1,1581.1 1413.31,1581.1 ; 1333.21,1699.21 1264.21,1768.21 W5500.28 1264.21,1861.11 1466.89,1861.11 1677,1651 ; 1677,1320 1677,1380.06 1677,1651 ; 1677,1320 1694.37,1302.63 R2.2@1694.37,1291.56 ; 1677,1651 1677,1696 1770,1789 1990,1789 2117,1916 2117,2101.54 2198.46,2183 R6.1@2198.46,2213
  Bottom Layer w7: v1(365.63,851) 592,851 v1(669.64,773.36) ; v1(742,446) v1(742,773)
pads on no net: "Right Comms.2" "Right Comms.3" "Right Comms.4" "Right Comms.5" RJ45.4 RJ45.5 RJ45.6 RJ45.10 RJ45.11 RJ45.12 RJ45.13 RJ45.14 RJ45.15 RJ45.16 RJ45.MH1 RJ45.MH2 W5500.7 W5500.12 W5500.13 W5500.18 W5500.23 W5500.26 W5500.38 W5500.39 W5500.40 W5500.41 W5500.42 W5500.46 W5500.47 Y1.2

## Polygon pours and split planes (outlines as drawn)
GND on Top Layer "GND_L01_P000" (solid, pour order 0): 0,75 0,2725 75,2800 2400,2800 2475,2725 2475,80 2395,0 75,0

## Keep-outs
Keep-Out Layer:
  lines w10: -5,70 70,-5 2400,-5 2480,75 2480,2730 2405,2805 70,2805 -5,2730 -5,70

## Silkscreen, mask and mechanical layers (free items; w line width, h text height)
Top Overlay:
  text "ECE1895 / Raheel Farouk / li.tel VTM Ethernet Module v0.1" at 55,2500 h60 r270
Mechanical 1:
  lines w10: 2395,0 75,0 0,75 0,2725 75,2800 2400,2800 2475,2725 2475,80 ; 2397.83,0 2477.83,80

## Dimensions
705.99,2323.15 to 1745.55,2313.15 on Top Overlay

## Text inside footprints (layer, text, board x,y; h text height)
"Left Comms": Top Overlay "6" at 663.27,2336.57 h77.5 r90; Top Overlay "1" at 663.27,1633.78 h77.5 r90; Mechanical 40 "12.700" at 513.27,1973.93 h15.5 r90; Mechanical 40 "15.240" at 810.79,1973.93 h15.5 r90; Mechanical 40 "2.540" at 570.79,1654.45 h15.5 r90; Mechanical 40 "2.540" at 643.27,1434.45 h15.5 r90; Top Component Center "6" at 663.27,2336.57 h77.5 r90; Top Component Center "1" at 663.27,1633.78 h77.5 r90
"Right Comms": Top Overlay "1" at 1838.27,1623.78 h77.5 r90; Top Overlay "6" at 1838.27,2326.57 h77.5 r90; Mechanical 40 "2.540" at 1818.27,1424.45 h15.5 r90; Mechanical 40 "2.540" at 1745.79,1644.45 h15.5 r90; Mechanical 40 "15.240" at 1985.79,1963.93 h15.5 r90; Mechanical 40 "12.700" at 1688.27,1963.93 h15.5 r90; Top Component Center "1" at 1838.27,1623.78 h77.5 r90; Top Component Center "6" at 1838.27,2326.57 h77.5 r90